# Altium PCB PCB v3.PcbDoc
Units mm, origin at the board's own origin, x right, y up, seen from the top; angles counter-clockwise.
Board outline 195 x 100 mm, 2 copper layers (Top Layer, Bottom Layer); 69 components, 54 nets, 224 pads, 43 vias.
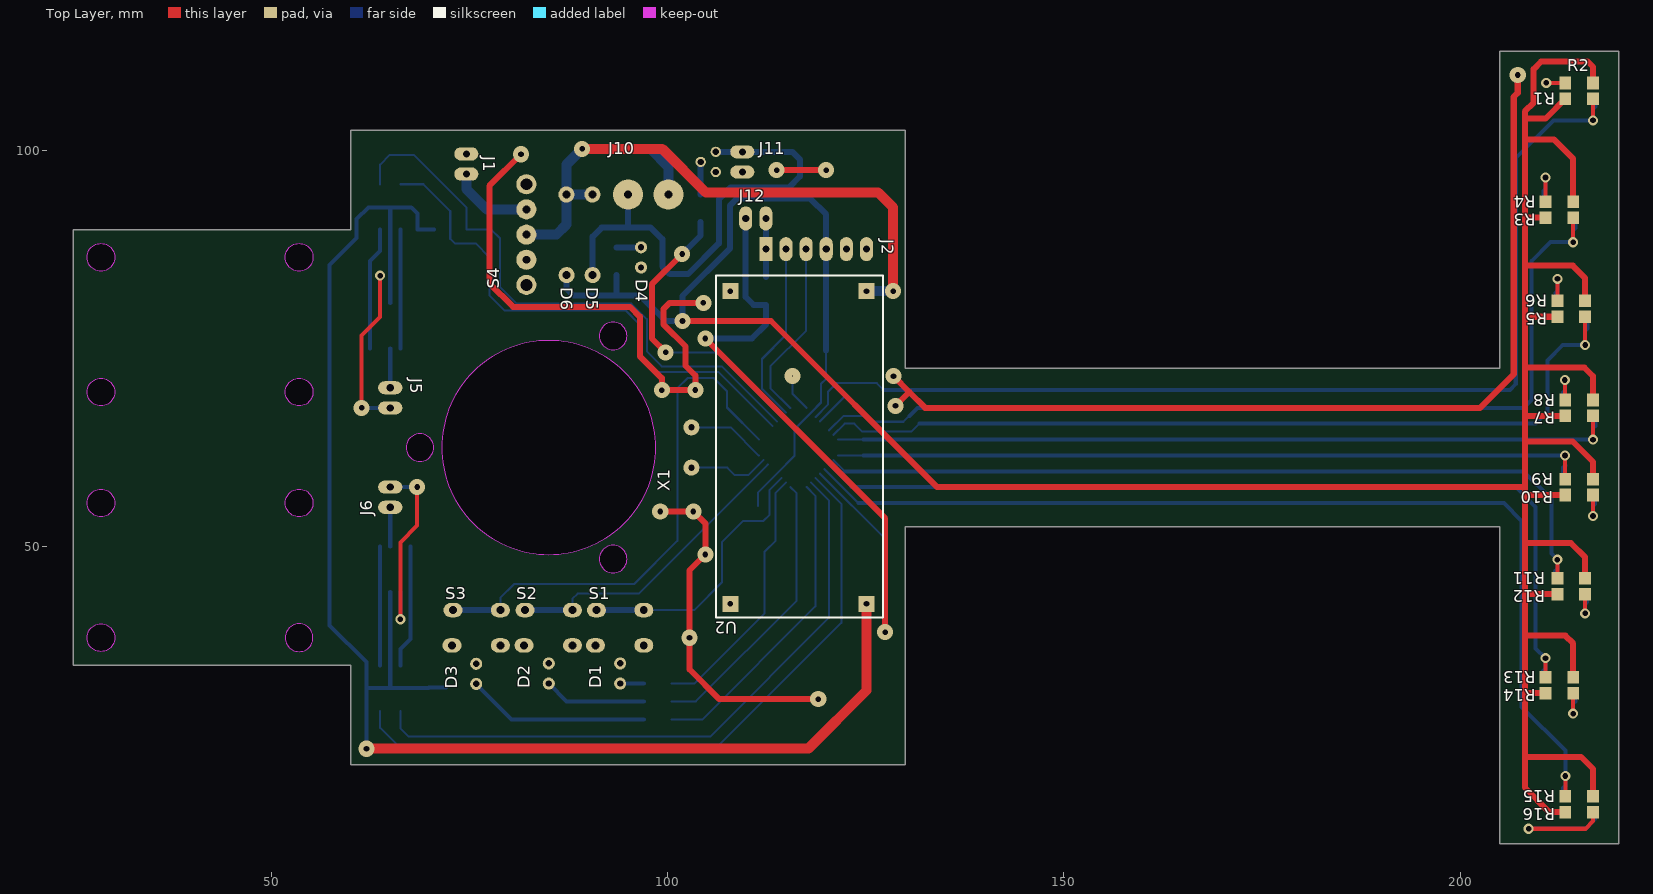
[diagram p0: Top Layer view]
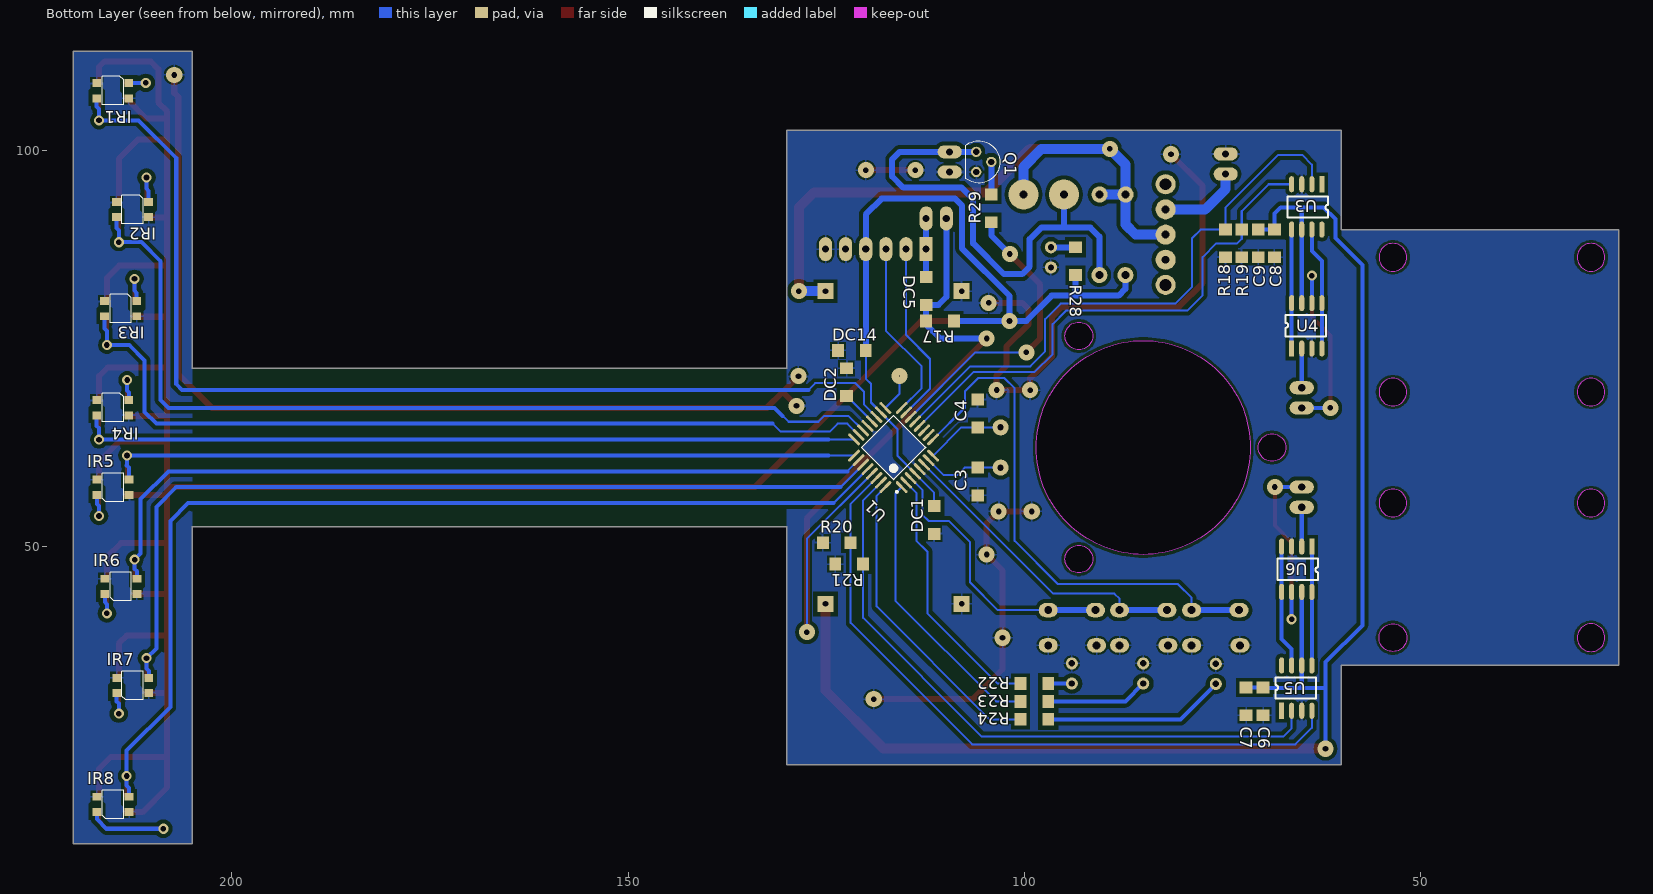
[diagram p1: Bottom Layer view, seen from below]

## Layer stack, top to bottom
Top Solder: solder mask 0.0102, Solder Resist, Dk 3.5
Top Layer: signal copper 0.0356
Dielectric 1: dielectric 0.32, FR-4, Dk 4.8
Bottom Layer: signal copper 0.0356
Bottom Solder: solder mask 0.0102, Solder Resist, Dk 3.5

## Board outline
60,22.5 60,35 25,35 25,90 60,90 60,102.5 130,102.5 130,72.5 205,72.5 205,112.5 220,112.5 220,12.5 205,12.5 205,52.5 130,52.5 130,22.5
cut-out: 53.5,67.75 cw(c53.5,69.5) 51.75,69.5 cw(c53.5,69.5) 53.5,71.25 cw(c53.5,69.5) 55.25,69.5 cw(c53.5,69.5)
cut-out: 53.5,84.75 cw(c53.5,86.5) 51.75,86.5 cw(c53.5,86.5) 53.5,88.25 cw(c53.5,86.5) 55.25,86.5 cw(c53.5,86.5)
cut-out: 28.5,84.75 cw(c28.5,86.5) 26.75,86.5 cw(c28.5,86.5) 28.5,88.25 cw(c28.5,86.5) 30.25,86.5 cw(c28.5,86.5)
cut-out: 28.5,67.75 cw(c28.5,69.5) 26.75,69.5 cw(c28.5,69.5) 28.5,71.25 cw(c28.5,69.5) 30.25,69.5 cw(c28.5,69.5)
cut-out: 28.5,36.75 cw(c28.5,38.5) 26.75,38.5 cw(c28.5,38.5) 28.5,40.25 cw(c28.5,38.5) 30.25,38.5 cw(c28.5,38.5)
cut-out: 51.75,38.5 ccw(c53.5,38.5) 53.5,36.75 ccw(c53.5,38.5) 55.25,38.5 ccw(c53.5,38.5) 53.5,40.25 ccw(c53.5,38.5)
cut-out: 53.5,53.75 cw(c53.5,55.5) 51.75,55.5 cw(c53.5,55.5) 53.5,57.25 cw(c53.5,55.5) 55.25,55.5 cw(c53.5,55.5)
cut-out: 28.5,53.75 cw(c28.5,55.5) 26.75,55.5 cw(c28.5,55.5) 28.5,57.25 cw(c28.5,55.5) 30.25,55.5 cw(c28.5,55.5)
cut-out: 67,62.5 ccw(c68.75,62.5) 68.75,60.75 ccw(c68.75,62.5) 70.5,62.5 ccw(c68.75,62.5) 68.75,64.25 ccw(c68.75,62.5)
cut-out: 71.5,62.5 ccw(c85,62.5) 85,49 ccw(c85,62.5) 98.5,62.5 ccw(c85,62.5) 85,76 ccw(c85,62.5)
cut-out: 91.375,76.573 ccw(c93.125,76.573) 93.125,74.823 ccw(c93.125,76.573) 94.875,76.573 ccw(c93.125,76.573) 93.125,78.323 ccw(c93.125,76.573)
cut-out: 91.375,48.427 ccw(c93.125,48.427) 93.125,46.677 ccw(c93.125,48.427) 94.875,48.427 ccw(c93.125,48.427) 93.125,50.177 ccw(c93.125,48.427)

## Design rules (kind name [scope] priority, off if disabled: settings)
Clearance [All] p1: gap=0.381 except(0.508: Arc-Poly Track-Poly SMDPad-Poly THPad-Poly Via-Poly Fill-Poly Poly-Poly)
HoleSize [All] p1: absolutevalues=TRUE maxlimit=350 minlimit=0.025 maxpercent=80.000 minpercent=20.000
PolygonConnect [All] p1: connectstyle=Relief reliefconductorwidth=0.254 reliefentries=4 polygonreliefangle="90 Angle" airgapwidth=0.254
RoutingVias [All] p1: holewidth=0.711 width=1.27 viastyle="Through Hole" minholewidth=0.711 minwidth=1.27 maxholewidth=0.711 maxwidth=2.032
SolderMaskExpansion [All] p1: expansion=0.102
Width [All] p1: maxlimit=1.27 minlimit=0.254 preferedwidth=0.508
29 further rules are at their usual default settings.

## Components (designator, comment, footprint, x,y, rotation, side; value= is the part's Value field where it differs from the comment)
C3 "CAP-CER" C1206 105.86,58.21 r90 bottom
C4 "CAP-CER" C1206 105.86,66.79 r270 bottom
C6 "CAP-CER" C1206 69.88,30.47 r90 bottom
C7 "CAP-CER" C1206 72.03,30.47 r90 bottom
C8 "CAP-CER" C1206 68.44,88.25 r90 bottom
C9 "CAP-CER" C1206 70.5,88.25 r90 bottom
D1 "LED" LED-3MM-YELLOW 94,33.99 r90 top
D2 "LED" LED-3MM-YELLOW 85,33.99 r90 top
D3 "LED" LED-3MM-YELLOW 75.84,33.944 r90 top
D4 "LED" LED-3MM-RED 96.64,86.49 r270 top
D5 "DIODE" DO-41 90.5,89.975 r270 top
D6 "1N5822" DO-41 87.257,88.705 r90 top
DC1 "CAP-CER" C1206 111.38,53.35 r270 bottom
DC2 "CAP-CER" C1206 122.432,70.748 r90 bottom
DC5 "CAP-CER" C1206 112.385,82.25 r90 bottom
DC14 "CAP-CER" C1206 121.755,74.75 r180 bottom
IR1 "QRE1113GR" QRE1113GR 215,107.5 r0 bottom
IR2 "QRE1113GR" QRE1113GR 212.5,92.5 r0 bottom
IR3 "QRE1113GR" QRE1113GR 214,80 r0 bottom
IR4 "QRE1113GR" QRE1113GR 215,67.5 r0 bottom
IR5 "QRE1113GR" QRE1113GR 215,57.5 r180 bottom
IR6 "QRE1113GR" QRE1113GR 214,45 r180 bottom
IR7 "QRE1113GR" QRE1113GR 212.5,32.5 r180 bottom
IR8 "QRE1113GR" QRE1113GR 215,17.5 r180 bottom
J1 "BAT" "HEADER 1x2" 74.6,98.27 r180 top
J2 "UART" "Header 1x6" 112.385,87.53 r90 top
J5 "MOT IZQ" "HEADER 1x2" 65,68.77 r0 top
J6 "MOT DER" "HEADER 1x2" 65,56.23 r180 top
J10 "EDF" BLOCK_TERMINAL-2 97.55,94.42 r270 top
J11 "JUMPER" JUMPER 109.42,98.53 r180 top
J12 "JUMPER" JUMPER 111.115,91.4 r90 top
Q1 "2N2222A" TO-92 105.118,98.53 r270 bottom
R1 "RES" R1206 215,106.5 r180 top
R2 "RES" R1206 215,108.5 r0 top
R3 "RES" R1206 212.5,91.5 r180 top
R4 "RES" R1206 212.5,93.5 r0 top
R5 "RES" R1206 214,79 r180 top
R6 "RES" R1206 214,81 r0 top
R7 "RES" R1206 215,66.5 r180 top
R8 "RES" R1206 215,68.5 r0 top
R9 "RES" R1206 215,58.5 r0 top
R10 "RES" R1206 215,56.5 r180 top
R11 "RES" R1206 214,46 r0 top
R12 "RES" R1206 214,44 r180 top
R13 "RES" R1206 212.5,33.5 r0 top
R14 "RES" R1206 212.5,31.5 r180 top
R15 "RES" R1206 215,18.5 r0 top
R16 "RES" R1206 215,16.5 r180 top
R17 "RES" R1206 110.635,78.46 r180 bottom
R18 "RES" R1206 74.63,88.25 r90 bottom
R19 "RES" R1206 72.57,88.25 r90 bottom
R20 "RES" R1206 123.66,50.48 r180 bottom
R21 "RES" R1206 122.1,47.8 r180 bottom
R22 "RES" R1206 98.734,32.72 r0 bottom
R23 "RES" R1206 98.734,30.46 r0 bottom
R24 "RES" R1206 98.734,28.21 r0 bottom
R28 "RES" R1206 93.55,86.01 r270 bottom
R29 "RES" R1206 104.165,92.67 r90 bottom
S1 "BUTTON" TACT_SWITCH-SMALL-4PIN 96.984,41.982 r180 top
S2 "BUTTON" TACT_SWITCH-SMALL-4PIN 87.985,41.982 r180 top
S3 "BUTTON" TACT_SWITCH-SMALL-4PIN 78.888,41.982 r180 top
S4 "SLIDE-SWITCH" SWITCH 82.18,89.365 r270 top
U1 "ATmega328PB-AUR" 32A_M 116.5,62.5 r45 bottom
U2 "XL6009 Module" "XL6009 mdl" 116.5,62.5 r270 top
U3 "4427" SOIC-8 62.46,101.176 r270 bottom
U4 "ZXMHC3F381N8" SOIC-8 66.27,69.539 r90 bottom
U5 "4427" SOIC-8 67.54,23.824 r90 bottom
U6 "ZXMHC3F381N8" SOIC-8 63.73,55.461 r270 bottom
X1 "XTAL" HC-49/S 103,62.5 r270 top

## Footprints (in the part's own frame and the unit in brackets; to place one, negate y for a bottom-side part, rotate by r counter-clockwise, add the part's x,y. Pads: shape width x height; smd on the part's side, far side on the other; paste and mask are expansions set on the pad)
32A_M [mm] "Thin QFP, 32-Leads, Body 7x7mm, Pitch 0.8mm, IPC Low Density"
  oval 1.95x0.381 smd: 1(-4.25,2.8) 2(-4.25,2) 3(-4.25,1.2) 4(-4.25,0.4) 5(-4.25,-0.4) 6(-4.25,-1.2) 7(-4.25,-2) 8(-4.25,-2.8) 17(4.25,-2.8) 18(4.25,-2) 19(4.25,-1.2) 20(4.25,-0.4) 21(4.25,0.4) 22(4.25,1.2) 23(4.25,2) 24(4.25,2.8)
  oval 0.381x1.95 smd: 9(-2.8,-4.25) 10(-2,-4.25) 11(-1.2,-4.25) 12(-0.4,-4.25) 13(0.4,-4.25) 14(1.2,-4.25) 15(2,-4.25) 16(2.8,-4.25) 25(2.8,4.25) 26(2,4.25) 27(1.2,4.25) 28(0.4,4.25) 29(-0.4,4.25) 30(-1.2,4.25) 31(-2,4.25) 32(-2.8,4.25)
  silkscreen extent -4.37,-2.85 2.85,3.77, body extent -3.5,-3.5 3.5,3.5, height 1.2
BLOCK_TERMINAL-2 [mm]
  round 3.81 hole 1: 1(0,2.54) 2(0,-2.54)
  body extent -4.57,-5 3.43,5, height 10.16
C1206 [mm]
  rect 1.5x1.6 smd: 1(-1.75,0) 2(1.75,0)
  body extent -1.6,-0.76 1.6,0.84, height 1.26
DO-41 [mil]
  round 80 hole 39.37: A(224.99,1.45) K(-175,0)
  body extent -192,-52 242,55, height 107
HC-49/S [mil]
  round 80 hole 31.5: 1(-100,0) 2(100,0)
  body extent -223,-90 223,93, height 138
"HEADER 1x2" [mil]
  oval 120x65 hole 35.43: 1(0,50) 2(0,-50)
  body extent -49,-100 49,100, height 336
"Header 1x6" [mil]
  rect 120x65 hole 35.43: 1(0,0)
  oval 120x65 hole 35.43: 2(0,-100) 3(0,-200) 4(0,-300) 5(0,-400) 6(0,-500)
  body extent -49,-550 49,50, height 336
JUMPER [mil]
  oval 120x65 hole 35.43: 1(0,50) 2(0,-50)
  body extent -49,-100 49,100, height 350
LED-3MM-RED [mil]
  round 60 hole 31.5: A(-50,0) K(50,0)
  body extent -66,-65 64,65, height 217
LED-3MM-YELLOW [mil]
  round 60 hole 31.5: A(-50,0) K(50,0)
  body extent -66,-65 64,65, height 217
QRE1113GR [mm]
  rect 1.1x1 smd: A(-2.01,-0.97) C(2.04,0.94) E(-2.01,0.94) K(2.04,-0.97)
  silkscreen extent -1.35,-1.85 1.35,1.75, body extent -2.4,-1.8 2.4,1.8, height 1.83
R1206 [mm]
  rect 1.5x1.6 smd: 1(-1.75,0) 2(1.75,0)
  body extent -1.6,-0.76 1.6,0.84, height 0.68
SOIC-8 [mil]
  rect 80x25 smd: 1(215,0)
  oval 80x25 smd: 2(215,-50) 3(215,-100) 4(215,-150) 5(440,-150) 6(440,-100) 7(440,-50) 8(440,0)
  silkscreen extent 275,-170 380,30, body extent 212,-171 448,21, height 69
SWITCH [mm]
  round 2.54 hole 1: 1(-3.175,0) 2(0,0) 3(3.175,0)
  round 2.54 hole 1.5: 4(-6.35,0) 4(6.35,0)
  body extent -7,-3.1 7,3.1, height 9.65
TACT_SWITCH-SMALL-4PIN [mm]
  oval 2.4x1.8 hole 1: 1(0,4.445) 1(6.096,4.445) 2(0,0) 2(5.969,0)
  body extent -0.94,-0.79 7.04,5.21, height 5.15
TO-92 [mm]
  round 1.3 hole 0.8: B(0,0.953) C(-1.27,-0.952) E(1.27,-0.953)
  silkscreen extent -2.67,-2.29 2.67,2.03, body extent -2.41,-1.97 2.42,1.46, height 7.37
"XL6009 mdl" [mil]
  rect 80x80 hole 27.56: 0(-777,338) 1(-777,-338) 2(777,-338) 3(777,338)
  silkscreen extent -855,-411 845,419, body extent -850,-415 850,415, height 502

## Part data
D6: library part SCHOTTKY
J1 J5 J6: library part "Header 1x2"
J2: library part "Header 1x6"
J10: library part 2-BLOCK_TERMINAL
Q1: library part NPN
U1: "8-bit AVR Microcontroller, 32KB Flash, 1KB EEPROM, 2KB SRAM, 32-pin TQFP, Industrial Grade (-40°C to 85°C), Reel"

## Via types
v1: diameter 2.032, hole 0.711, Top Layer to Bottom Layer, 24 vias
v2: diameter 1.27, hole 0.711, Top Layer to Bottom Layer, 18 vias
v3: diameter 2.032, hole 0, Top Layer to Bottom Layer, 1 vias

## Nets (pads, with @x,y where several pads share a name; then routed paths per layer and width w, separated by ;. In a path a pad name is that pad's centre, name@x,y a point inside that pad or via, vN(x,y) a via of type N, cw(c..) or ccw(c..) an arc to the next point about the centre after c; other vN are vias at no path point)
BAT: D5.K D6.A J10.1 S4.2 U2.0 | length 90.7
  Top Layer w1.27: v1(89.21,100.18) 99.31,100.18 104.81,94.68 126.56,94.68 128.45,92.79 v1@128.45,82.31
  Bottom Layer w1.27: S4.2 85.965,89.365 87.22,90.62 D6.A ; D5.K D6.A ; J10.1 100.09,97.91 97.82,100.18 v1(89.21,100.18) 87.22,98.19 D6.A ; U2.0 v1(128.45,82.236)
BTN1: S1.2 U1.3 | length 35
  Bottom Layer w0.254: S1.2@96.984,41.982 103.343,41.982 106.83,45.47 106.83,50.54 109.54,53.25 112.09,53.25 112.86,54.02 112.86,57.163 U1.3
  Bottom Layer w0.762: S1.2@91.015,41.982 S1.2@96.984,41.982
BTN2: S2.2 U1.6 | length 39.1
  Bottom Layer w0.254: S2.2@87.985,41.982 87.985,43.415 88.64,44.07 96.342,44.07 112.615,60.343 U1.6
  Bottom Layer w0.762: S2.2@82.016,41.982 S2.2@87.985,41.982
BTN3: S3.2 U1.9 | length 67.3
  Bottom Layer w0.254: S3.2@78.888,41.982 78.888,43.528 80.61,45.25 95.75,45.25 101.23,50.73 101.23,69.98 102.524,71.274 105.806,71.274 107.49,69.59 107.49,67.55 U1.9
  Bottom Layer w0.762: S3.2@72.919,41.982 S3.2@78.888,41.982
EDF: R29.1 U1.14 | length 37.7
  Top Layer w0.762: v1(99.75,74.5) 98,76.25 98,83.08 v1(101.83,86.91)
  Bottom Layer w0.254: v1(99.75,74.5) 106.197,74.5 U1.14
  Bottom Layer w0.762: v1(101.83,86.91) 104.165,89.245 R29.1
GND: C3.1 C4.1 C6.1 C7.1 C8.1 C9.1 D1.K D2.K D3.K D4.K DC1.2 DC2.2 DC14.1 IR1.E IR1.K IR2.E IR2.K IR3.E IR3.K IR4.E IR4.K IR5.E IR5.K IR6.E IR6.K IR7.E IR7.K IR8.E IR8.K J1.2 J2.5 J2.6 J11.1 Q1.E R18.1 R19.1 R20.1 R21.1 S1.1 S2.1 S3.1 U1.5 U1.21 U2.1 U2.2 U3.3 U4.3 U5.3 U6.3 | length 242.2
  Top Layer w0.762: v1(81.5,99.5) 77.5,95.5 77.5,83.25 80.5,80.25 95.25,80.25 96.5,79 96.5,74 99.263,71.237 v1(99.263,69.737) 99.275,69.75 v1(103.5,69.75) 103.5,71.587 102.25,72.837 102.25,75.25 99.5,78 99.5,80 100.25,80.75 v1(104.5,80.75) ; v1(99.07,54.43) v1(103.24,54.43) 104.75,52.92 v1(104.75,49) 102.75,47 v1(102.75,38.5) 102.75,34.5 106.5,30.75 v1(119,30.75) ; v1(113.75,97.5) v1(120,97.5) ; v1(128.5,71.5) 130.5,69.5 ; v1(128.75,67.75) 130.5,69.5 ; v1(207.25,109.5) 207.25,107.25 206.75,106.75 206.75,71.75 202.5,67.5 132.5,67.5 130.5,69.5
IR1: IR1.C R1.1 U1.19 | length 137.6
  Top Layer w0.508: v2(216.75,103.77) R1.1
  Bottom Layer w0.254: U1.19 120.254,67.951 120.254,69.564 121.304,70.614 126.386,70.614 127.25,69.75
  Bottom Layer w0.508: 127.25,69.75 206.25,69.75 207,70.5 207,99 211.77,103.77 v2(216.75,103.77) 216.75,105.21 217.04,105.5 IR1.C
IR2: IR2.C R3.1 U1.22 | length 121
  Top Layer w0.508: v2(214.25,88.4) R3.1
  Bottom Layer w0.254: U1.22 122.197,66.5 125.25,66.5 126,65.75 129.75,65.75 130.5,66.5
  Bottom Layer w0.508: 130.5,66.5 131.5,67.5 208,67.5 209,68.5 209,86 211.4,88.4 v2(214.25,88.4) 214.25,89.88 214.54,90.17 IR2.C
IR3: IR3.C R5.1 U1.23 | length 111.5
  Top Layer w0.508: v2(215.75,75.43) R5.1
  Bottom Layer w0.254: U1.23 122.328,65.5 123.546,65.5 124.546,64.5 130.75,64.5 131.75,65.5
  Bottom Layer w0.508: 131.75,65.5 209.5,65.5 211,67 211,73.5 212.93,75.43 v2(215.75,75.43) 215.75,77.2 216.04,77.49 IR3.C
IR4: IR4.C R7.1 U1.24 | length 101.5
  Top Layer w0.508: v2(216.75,63.5) R7.1
  Bottom Layer w0.254: U1.24 124.695,63.525 ; 137.475,63.525 137.5,63.5
  Bottom Layer w0.508: 124.695,63.525 137.475,63.525 ; 137.5,63.5 v2(216.75,63.5) 216.75,64.94 217.04,65.23 IR4.C
IR5: IR5.C R9.1 U1.25 | length 98.1
  Top Layer w0.508: v2(213.21,61.5) 213.21,58.96 213,58.75 R9.1
  Bottom Layer w0.254: U1.25 124.715,61.475 ; 137.475,61.475 137.5,61.5
  Bottom Layer w0.508: 124.715,61.475 137.475,61.475 ; 137.5,61.5 v2(213.21,61.5) 213.21,60.31 ; IR5.C 212.96,59.96 213.26,60.26
IR6: IR6.C R11.1 U1.26 | length 105.5
  Top Layer w0.508: R11.1 v2(212.25,48.36)
  Bottom Layer w0.254: U1.26 122.328,59.5
  Bottom Layer w0.508: 122.328,59.5 208,59.5 211.5,56 211.5,49.11 v2(212.25,48.36) 212.25,47.18 211.96,46.89 IR6.C
IR7: IR7.C R13.1 U1.27 | length 116
  Top Layer w0.508: R13.1 v2(210.75,35.92)
  Bottom Layer w0.254: U1.27 123.197,57.5
  Bottom Layer w0.508: 123.197,57.5 207,57.5 209.5,55 209.5,37.17 v2(210.75,35.92) 210.75,34.61 210.46,34.32 IR7.C
IR8: IR8.C R15.1 U1.28 | length 130.4
  Top Layer w0.508: R15.1 v2(213.25,21.05)
  Bottom Layer w0.254: U1.28 124.066,55.5
  Bottom Layer w0.508: 124.066,55.5 205.5,55.5 207.75,53.25 207.75,29.75 213.25,24.25 v2(213.25,21.05) 213.25,19.83 212.96,19.54 IR8.C
LED1: R22.2 U1.2 | length 33
  Bottom Layer w0.254: R22.2 103.34,32.72 112.23,41.61 112.23,49.38 113.61,50.76 113.61,56.782 U1.2
LED2: R23.2 U1.1 | length 35.7
  Bottom Layer w0.254: R23.2 103.57,30.46 116.26,43.15 116.26,56.73 U1.1
LED3: R24.2 U1.32 | length 39.6
  Bottom Layer w0.254: R24.2 104.4,28.21 118.64,42.45 118.64,56.4 U1.32
MD_DIR: R20.2 U1.30 U5.4 | length 87.2
  Bottom Layer w0.254: U5.4 63.73,27.13 65.81,25.05 106.59,25.05 121.91,40.37 R20.2 121.91,55.393 U1.30
MD_PWM: R21.2 U1.31 U5.2 | length 80.9
  Bottom Layer w0.254: U5.2 66.27,27.09 67.29,26.07 105.41,26.07 120.35,41.01 R21.2 120.35,55.822 U1.31
MI_DIR: R19.2 U1.12 U3.4 | length 66.6
  Bottom Layer w0.254: U3.4 69.165,95.715 72.57,92.31 R19.2 72.57,88.82 73.14,88.25 75.78,88.25 77.5,86.53 77.5,81.73 79.47,79.76 94.74,79.76 96.44,78.06 96.44,74.29 98.73,72 106.434,72 U1.12
MI_PWM: R18.2 U1.13 U3.2 | length 74.5
  Bottom Layer w0.254: U3.2 63.73,98.19 64.96,99.42 67.94,99.42 74.63,92.73 R18.2 77.76,90 78.83,88.93 78.83,82.78 80.95,80.66 95.41,80.66 97.37,78.7 97.37,74.63 99.25,72.75 106.816,72.75 U1.13
NetD1_A: D1.A R22.1 | length 3
  Bottom Layer w0.508: D1.A R22.1
NetD2_A: D2.A R23.1 | length 12.9
  Bottom Layer w0.508: D2.A 87.26,30.46 R23.1
NetD3_A: D3.A R24.1 | length 23
  Bottom Layer w0.508: D3.A 80.304,28.21 R24.1
NetD4_A: D4.A R28.1 | length 3.1
  Bottom Layer w0.762: R28.1 D4.A
NetD5_A: D5.A J10.2 J11.2 Q1.C | length 61.6
  Bottom Layer w0.762: D5.A 90.537,89.107 91.68,90.25 95.01,90.25 ; J10.2 95.01,90.25 ; Q1.C J11.2 115.72,99.8 116.67,98.85 116.67,96.69 115.27,95.29 107.9,95.29 106.45,93.84 106.45,88.25 102.57,84.37 100.27,84.37 99.32,85.32 99.32,88.79 97.86,90.25 95.01,90.25
NetDC2_1: DC2.1 U1.20 | length 4.5
  Bottom Layer w0.254: U1.20 DC2.1
NetDC5_2: DC5.2 J2.1 J12.2 | length 7.4
  Bottom Layer w0.762: DC5.2 J2.1 J12.2
NetIR1_A: IR1.A R2.1 | length 4.5
  Top Layer w0.508: v2(210.85,108.51) 213.24,108.51 R2.1
  Bottom Layer w0.508: v2(210.85,108.51) IR1.A@212.99,108.51
NetIR2_A: IR2.A R4.1 | length 6.3
  Top Layer w0.508: R4.1 v2(210.75,96.56)
  Bottom Layer w0.508: IR2.A 210.49,94.89 210.75,95.15 v2(210.75,96.56)
NetIR3_A: IR3.A R6.1 | length 5.7
  Top Layer w0.508: R6.1 212.27,81.02 v2(212.27,83.78)
  Bottom Layer w0.508: IR3.A 211.99,82 212.27,82.28 v2(212.27,83.78)
NetIR4_A: IR4.A R8.1 | length 5.2
  Top Layer w0.508: v2(213.19,71.02) 213.19,68.6 213.27,68.52 R8.1
  Bottom Layer w0.508: IR4.A 212.99,69.47 213.19,69.67 v2(213.19,71.02)
NetIR5_A: IR5.A R10.1 | length 5.4
  Top Layer w0.508: v2(216.75,53.86) R10.1
  Bottom Layer w0.508: v2(216.75,53.86) 216.75,55.14 217.01,55.4 IR5.A
NetIR6_A: IR6.A R12.1 | length 5
  Top Layer w0.508: v2(215.75,41.57) R12.1
  Bottom Layer w0.508: v2(215.75,41.57) 215.75,42.72 216.01,42.98 IR6.A
NetIR7_A: IR7.A R14.1 | length 5.3
  Top Layer w0.508: v2(214.25,28.92) R14.1
  Bottom Layer w0.508: v2(214.25,28.92) 214.25,30.22 214.51,30.48 IR7.A
NetIR8_A: IR8.A R16.1 | length 19.5
  Top Layer w0.508: v2(208.63,14.4) 215.79,14.4 216.75,15.36 R16.1
  Bottom Layer w0.508: v2(208.63,14.4) 215.79,14.4 217.01,15.62 IR8.A
NetJ1_1: J1.1 S4.1 | length 10.5
  Bottom Layer w1.27: J1.1 74.6,95.12 77.18,92.54 S4.1
NetJ5_1: J5.1 U4.2 | length 5
  Bottom Layer w0.508: J5.1 U4.2
NetJ5_2: J5.2 U4.6 | length 24.7
  Top Layer w0.508: v1(61.39,67.5) 61.39,76.61 63.73,78.95 v2(63.73,84.18)
  Bottom Layer w0.508: v1(61.39,67.5) J5.2 ; U4.6 v2(63.73,84.18)
NetJ6_1: J6.1 U6.2 | length 5
  Bottom Layer w0.508: U6.2 J6.1
NetJ6_2: J6.2 U6.6 | length 24.4
  Top Layer w0.508: v2(66.27,40.83) 66.27,50.53 68.39,52.65 v1(68.39,57.51)
  Bottom Layer w0.508: J6.2 68.38,57.5 v1(68.39,57.51) ; v2(66.27,40.83) U6.6
NetQ1_B: Q1.B R29.2 | length 4.1
  Bottom Layer w0.762: R29.2 Q1.B
NetU3_5: U3.5 U4.1 U4.8 | length 15
  Bottom Layer w0.508: U4.1 U4.8 U3.5
NetU3_7: U3.7 U4.4 U4.5 | length 15.5
  Bottom Layer w0.508: U4.4 U4.5 62.46,86.03 63.73,87.3 U3.7
NetU5_5: U5.5 U6.1 U6.8 | length 15
  Bottom Layer w0.508: U5.5 U6.8 U6.1
NetU5_7: U5.7 U6.4 U6.5 | length 15.5
  Bottom Layer w0.508: U5.7 66.27,37.08 67.54,38.35 U6.5 U6.4
RST: DC5.1 J12.1 R17.1 U1.29 | length 93.6
  Top Layer w0.762: v1(104.75,76.25) 127.43,53.57 v1(127.43,39.2)
  Bottom Layer w0.254: U1.29 127.43,51.004 v1(127.43,39.2)
  Bottom Layer w0.762: v1(104.75,76.25) 110.63,76.25 112.385,78.005 R17.1 DC5.1 110.83,80.5 109.845,81.485 J12.1
RXD/MISO: J2.3 U1.16 | length 22.9
  Bottom Layer w0.254: U1.16 112.97,69.99 112.97,72.76 117.465,77.255 J2.3
SCK0: U1.17 | length 4.8
  Bottom Layer w0.254: v3(115.75,71.5) 115.75,69.26 U1.17
TXD/MOSI: J2.2 U1.15 | length 23.1
  Bottom Layer w0.254: U1.15 111.9,69.928 111.9,73.67 114.925,76.695 J2.2
VCC: D6.K DC1.1 DC14.2 J2.4 R1.2 R2.2 R3.2 R4.2 R5.2 R6.2 R7.2 R8.2 R9.2 R10.2 R11.2 R12.2 R13.2 R14.2 R15.2 R16.2 R17.2 R28.2 U1.4 U1.18 | length 432.9
  Top Layer w0.762: v1(101.87,78.46) 113.04,78.46 134,57.5 208.15,57.5 ; R14.2 208.15,31.5 ; R3.2 208.15,91.5 ; R12.2 208.15,44 ; R5.2 208.15,79 ; R16.2 211.25,16.5 208.15,19.6 208.15,23.45 ; R10.2 208.15,56.5 ; R7.2 208.15,66.5 ; R1.2 210.75,104 208.15,104 ; R13.2 214.25,37.78 213.27,38.76 208.15,38.76 ; R4.2 214.25,98.95 211.82,101.38 208.15,101.38 ; R11.2 215.75,48.66 213.97,50.44 208.15,50.44 ; R6.2 215.75,83.88 214.19,85.44 208.15,85.44 ; R15.2 216.75,21.95 215.25,23.45 208.15,23.45 ; R9.2 216.75,60.69 214.16,63.28 208.15,63.28 ; R8.2 216.75,71.5 215.66,72.59 208.15,72.59 ; R2.2 216.75,110.53 216.08,111.2 210.2,111.2 209.25,110.25 209.25,106 208.15,104.9 208.15,104 ; 208.15,23.45 208.15,31.5 ; 208.15,31.5 208.15,38.76 ; 208.15,38.76 208.15,44 ; 208.15,44 208.15,50.44 ; 208.15,50.44 208.15,56.5 ; 208.15,56.5 208.15,57.5 ; 208.15,57.5 208.15,63.28 ; 208.15,63.28 208.15,66.5 ; 208.15,66.5 208.15,72.59 ; 208.15,72.59 208.15,79 ; 208.15,79 208.15,85.44 ; 208.15,85.44 208.15,91.5 ; 208.15,91.5 208.15,101.38 ; 208.15,101.38 208.15,104
  Bottom Layer w0.254: DC1.1 111.38,56.814 U1.4 116,61.434 116,64.828 U1.18 119.35,68.178 119.35,70.53 120.005,71.185 DC14.2
  Bottom Layer w0.762: D6.K 87.257,82.513 88.11,81.66 93.55,81.66 ; R28.2 93.55,81.66 ; R17.2 v1(101.87,78.46) ; DC14.2 J2.4 120.005,91.905 118,93.91 108.72,93.91 107.87,93.06 107.87,87.63 101.87,81.63 v1(101.87,78.46) ; 93.55,81.66 96.55,81.66 99.75,78.46 v1(101.87,78.46)
VHI: C6.2 C7.2 C8.2 C9.2 U2.3 U3.6 U4.7 U5.6 U6.7 | length 194.2
  Top Layer w1.27: v1(62,24.5) 117.75,24.5 125.085,31.835 U2.3
  Bottom Layer w0.508: v1(62,24.5) 62,32.17 ; U6.7 U5.6 65,32.17 ; U4.7 U3.6 65,92.8 ; C9.2 C8.2 68.44,92.01 67.65,92.8 65,92.8 ; C7.2 C6.2 69.83,32.17 65,32.17 ; 62,32.17 65,32.17 ; 62,32.17 62,35.41 57.34,40.07 57.34,85.52 60.75,88.93 60.75,91.32 62.23,92.8 65,92.8
XTAL1: C3.2 U1.7 X1.2 | length 10.3
  Bottom Layer w0.254: X1.2 C3.2 107.52,59.96 108.47,59.01 110.182,59.01 U1.7
XTAL2: C4.2 U1.8 X1.1 | length 10
  Bottom Layer w0.254: X1.1 C4.2 107.95,65.04 U1.8
pads on no net: S4.3 S4.4 U1.10 U1.11 U3.1 U3.8 U5.1 U5.8

## Polygon pours and split planes (outlines as drawn)
GND on Bottom Layer "B-GND" (solid, remove dead copper, pour order 2): 205,72.5 205,112.5 220,112.5 220,12.5 205,12.5
GND on Bottom Layer "B-GND" (solid, remove dead copper, pour order 0): 130,102.5 130,22.5 60,22.5 60,35 25,35 25,90 60,90 60,102.5 130,102.5

## Silkscreen, mask and mechanical layers (free items; w line width, h text height)
Mechanical 1:
  circle w0.254: c28.5,55.5 r1.75
  circle w0.254: c28.5,38.5 r1.75
  circle w0.254: c53.5,38.5 r1.75
  circle w0.254: c53.5,55.5 r1.75
  circle w0.254: c53.5,69.5 r1.75
  circle w0.254: c28.5,69.5 r1.75
  circle w0.254: c28.5,86.5 r1.75
  circle w0.254: c53.5,86.5 r1.75
  circle w0.254: c85,62.5 r13.5
  circle w0.254: c93.125,76.573 r1.75
  circle w0.254: c93.125,48.427 r1.75
  circle w0.254: c68.75,62.5 r1.75
  lines w0.254: 26.75,38.5 30.25,38.5 ; 26.75,55.5 30.25,55.5 ; 26.75,69.5 30.25,69.5 ; 26.75,86.5 30.25,86.5 ; 28.5,36.75 28.5,40.25 ; 28.5,53.75 28.5,57.25 ; 28.5,67.75 28.5,71.25 ; 28.5,84.75 28.5,88.25 ; 51.75,38.5 55.25,38.5 ; 51.75,55.5 55.25,55.5 ; 51.75,69.5 55.25,69.5 ; 51.75,86.5 55.25,86.5 ; 53.5,36.75 53.5,40.25 ; 53.5,53.75 53.5,57.25 ; 53.5,67.75 53.5,71.25 ; 53.5,84.75 53.5,88.25 ; 67,62.5 70.5,62.5 ; 68.75,60.75 68.75,64.25 ; 71.5,62.5 98.5,62.5 ; 85,49 85,76 ; 91.375,48.427 94.875,48.427 ; 91.375,76.573 94.875,76.573 ; 93.125,46.677 93.125,50.177 ; 93.125,74.823 93.125,78.323 ; 25,35 60,35 60,22.5 130,22.5 130,52.5 205,52.5 205,12.5 220,12.5 220,112.5 205,112.5 205,72.5 130,72.5 130,102.5 60,102.5 60,90 25,90 25,35
Mechanical 2:
  circle w0.254: c93.125,76.573 r2.75
  circle w0.254: c93.125,48.427 r2.75
  circle w0.254: c68.75,62.5 r2.75
  lines w0.254: 25,62.5 60,62.5 85,62.5 ; 60,35 60,90
Mechanical 3:
  lines w0.254: 212.375,32.522 ccw(c42.5,62.5) 212.375,92.478
Mechanical 15:
  lines w0.254: 154,62.5 220,62.5 ; 159,58.75 159,62.5 159,66.25 ; 190,27.5 220,27.5 ; 190,39.5 190,85.5 ; 190,97.5 220,97.5 ; 200,27.5 200,97.5 ; 205,12.5 205,112.5 ; 215,27.5 215,97.5